# Altium PCB 解调.PcbDoc
Units mil, origin at the board's own origin, x right, y up, seen from the top; angles counter-clockwise.
Board outline 6000 x 4000 mil, 2 copper layers (Top Layer, Bottom Layer); 66 components, 17 nets, 180 pads, 0 vias.
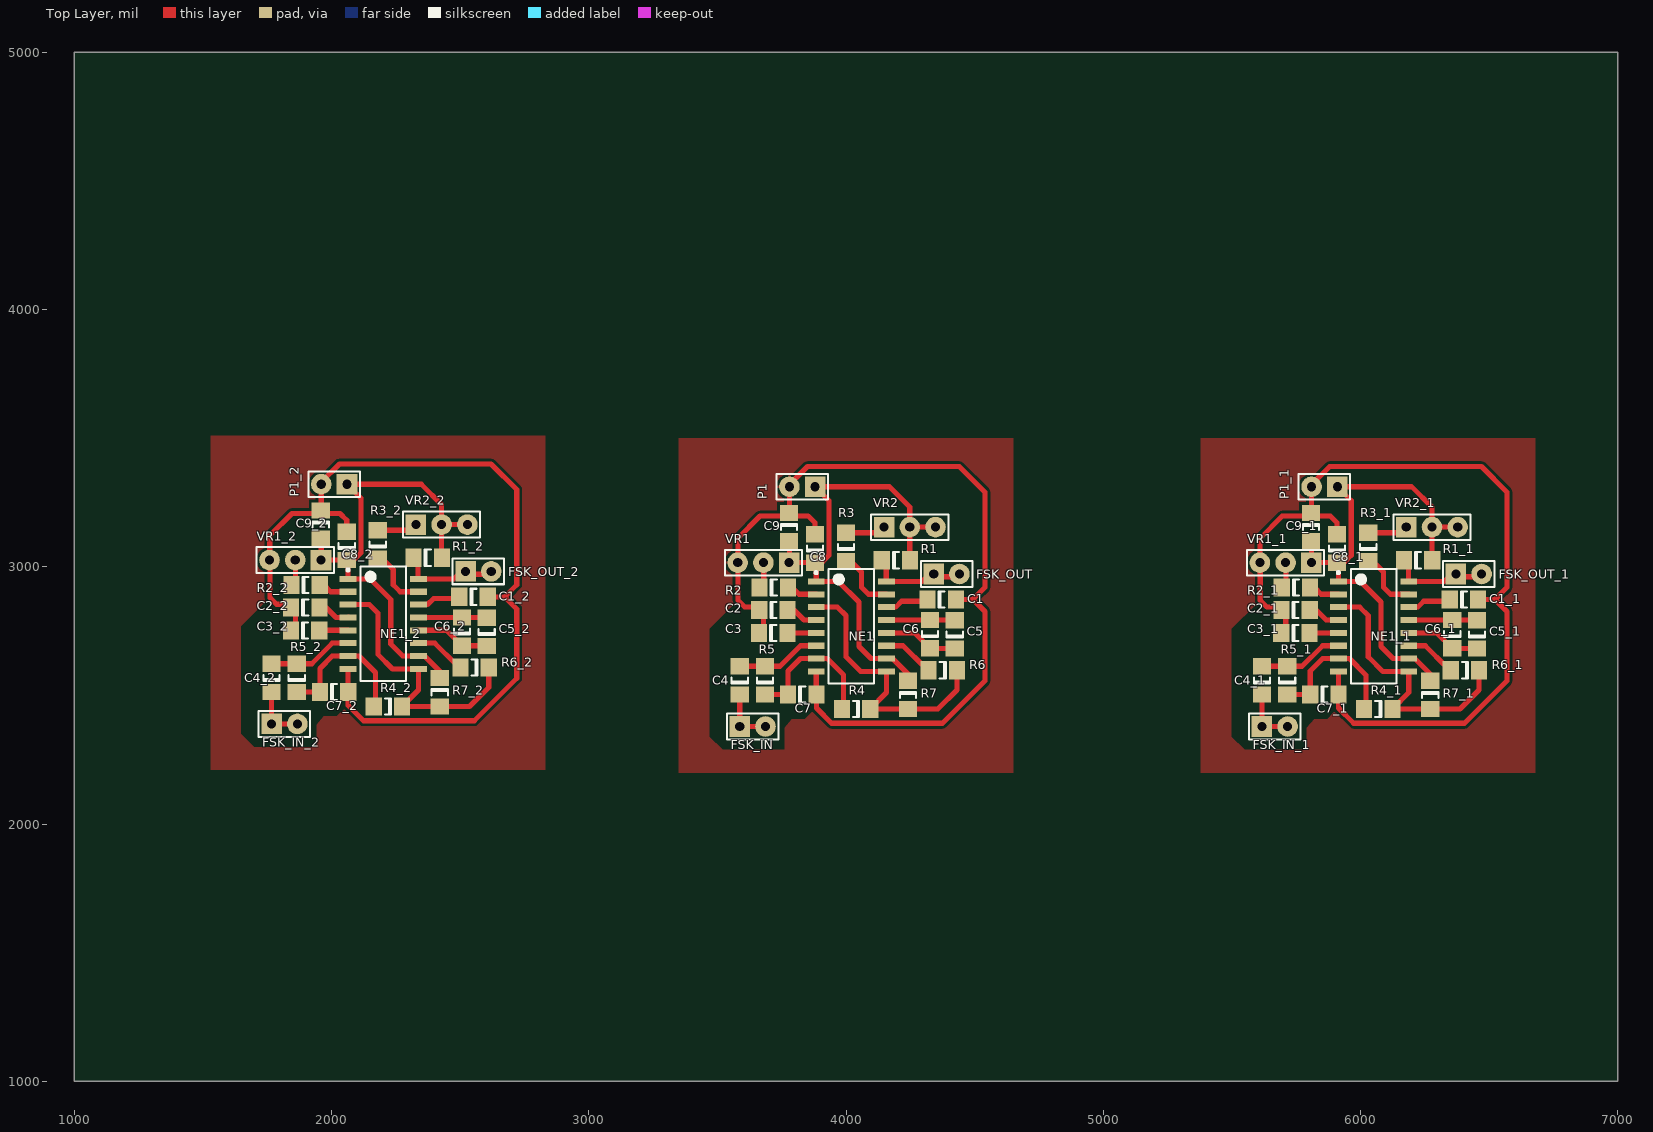
[diagram p0: Top Layer view]
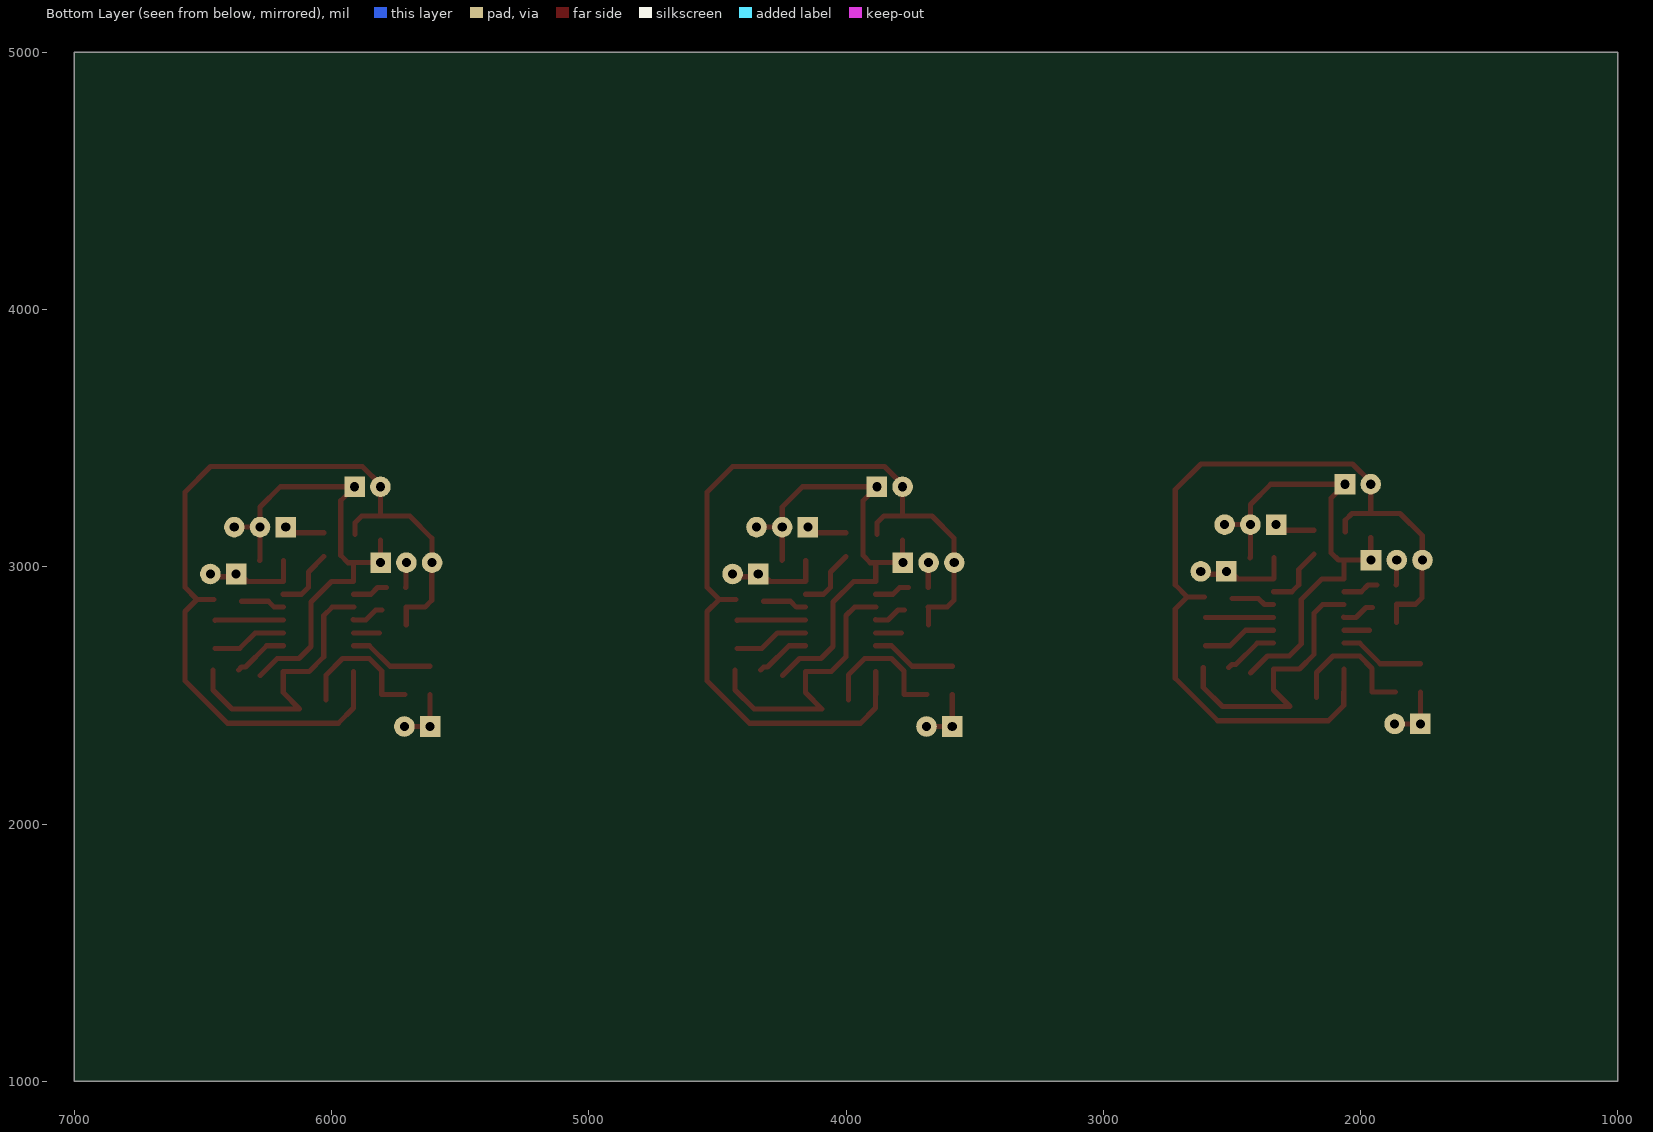
[diagram p1: Bottom Layer view, seen from below]

## Layer stack, top to bottom
Top Layer: signal copper 1.4
Dielectric: dielectric 12.6, FR-4, Dk 4.8
Bottom Layer: signal copper 1.4

## Board outline
1000,1000 7000,1000 7000,5000 1000,5000

## Design rules (kind name [scope] priority, off if disabled: settings)
Clearance [All] p1: gap=10
ComponentClearance [All] p1 off: gap=10 collisioncheckmode=3 verticalgap=10 showdistances=FALSE
MinimumSolderMaskSliver [All] p1 off: minsoldermaskwidth=10
PolygonConnect [All] p1: connectstyle=Relief reliefconductorwidth=10 reliefentries=4 polygonreliefangle="90 Angle"
RoutingVias [All] p1: holewidth=28 width=50 viastyle="Through Hole" minholewidth=28 minwidth=50 maxholewidth=28 maxwidth=50
SilkToSilkClearance [All] p1 off: silktosilkclearance=10
SilkscreenOverComponentPads [All] p1 off: minsilkscreentomaskgap=10
SolderMaskExpansion [All] p1: expansion=4
TestPointUsage [All] p1: valid=0 allowmultiple=FALSE
Testpoint [All] p1: side=15 testpointundercomponent=TRUE minsize=40 maxsize=100 preferedsize=60 minholesize=0 maxholesize=40 preferedholesize=32 testpointgrid=1 style=1023 order=0123456789
Width [All] p1: maxlimit=60 minlimit=20 preferedwidth=40
20 further rules are at their usual default settings.

## Classes and differential pairs
component class NE564解调: C1 C2 C3 C4 C5 C6 C7 C8 C9 C? FSK_IN FSK_OUT JP1 NE1 P1 P2 P? R1 R2 R3 R4 R5 R6 R7 R8 R? VR1 VR2 VR?

## Components (designator, comment, footprint, x,y, rotation, side; value= is the part's Value field where it differs from the comment)
C1 "Cap Pol1" C1206 4372,2873 r0 top
C1_1 "Cap Pol1" C1206 6402,2873 r0 top (schematic designator C1)
C1_2 "Cap Pol1" C1206 2552,2883 r0 top (schematic designator C1)
C2 "Cap" C1206 3718,2832 r0 top
C2_1 "Cap" C1206 5748,2832 r0 top (schematic designator C2)
C2_2 "Cap" C1206 1898,2842 r0 top (schematic designator C2)
C3 "Cap" C1206 3717,2742 r0 top
C3_1 "Cap" C1206 5747,2742 r0 top (schematic designator C3)
C3_2 "Cap" C1206 1897,2752 r0 top (schematic designator C3)
C4 "Cap" C1206 3587,2558 r90 top
C4_1 "Cap" C1206 5617,2558 r90 top (schematic designator C4)
C4_2 "Cap" C1206 1767,2568 r90 top (schematic designator C4)
C5 "Cap" C1206 4423,2737 r90 top
C5_1 "Cap" C1206 6453,2737 r90 top (schematic designator C5)
C5_2 "Cap" C1206 2603,2747 r90 top (schematic designator C5)
C6 "Cap" C1206 4327,2738 r90 top
C6_1 "Cap" C1206 6357,2738 r90 top (schematic designator C6)
C6_2 "Cap" C1206 2507,2748 r90 top (schematic designator C6)
C7 "Cap" C1206 3830,2503 r0 top
C7_1 "Cap" C1206 5860,2503 r0 top (schematic designator C7)
C7_2 "Cap" C1206 2010,2513 r0 top (schematic designator C7)
C8 "Cap Pol1" C1206 3879,3071 r90 top
C8_1 "Cap Pol1" C1206 5909,3071 r90 top (schematic designator C8)
C8_2 "Cap Pol1" C1206 2059,3081 r90 top (schematic designator C8)
C9 "Cap" C1206 3778,3154 r270 top
C9_1 "Cap" C1206 5808,3154 r270 top (schematic designator C9)
C9_2 "Cap" C1206 1958,3164 r270 top (schematic designator C9)
FSK_IN "Header 2" HDR1X2 3587,2379 r0 top
FSK_IN_1 "Header 2" HDR1X2 5617,2379 r0 top (schematic designator FSK_IN)
FSK_IN_2 "Header 2" HDR1X2 1767,2389 r0 top (schematic designator FSK_IN)
FSK_OUT "Header 2" HDR1X2 4341,2972 r0 top
FSK_OUT_1 "Header 2" HDR1X2 6371,2972 r0 top (schematic designator FSK_OUT)
FSK_OUT_2 "Header 2" HDR1X2 2521,2982 r0 top (schematic designator FSK_OUT)
NE1 "NE564" SO-16 4021,2768 r270 top
NE1_1 "NE564" SO-16 6051,2768 r270 top (schematic designator NE1)
NE1_2 "NE564" SO-16 2201,2778 r270 top (schematic designator NE1)
P1 "Header 2" HDR1X2 3880,3311 r180 top
P1_1 "Header 2" HDR1X2 5910,3311 r180 top (schematic designator P1)
P1_2 "Header 2" HDR1X2 2060,3321 r180 top (schematic designator P1)
R1 "Res2" C1206 4194,3025 r0 top
R1_1 "Res2" C1206 6224,3025 r0 top (schematic designator R1)
R1_2 "Res2" C1206 2374,3035 r0 top (schematic designator R1)
R2 "Res2" C1206 3719,2919 r0 top
R2_1 "Res2" C1206 5749,2919 r0 top (schematic designator R2)
R2_2 "Res2" C1206 1899,2929 r0 top (schematic designator R2)
R3 "Res2" C1206 4000,3077 r90 top
R3_1 "Res2" C1206 6030,3077 r90 top (schematic designator R3)
R3_2 "Res2" C1206 2180,3087 r90 top (schematic designator R3)
R4 "Res2" C1206 4039,2447 r180 top
R4_1 "Res2" C1206 6069,2447 r180 top (schematic designator R4)
R4_2 "Res2" C1206 2219,2457 r180 top (schematic designator R4)
R5 "Res2" C1206 3685,2558 r90 top
R5_1 "Res2" C1206 5715,2558 r90 top (schematic designator R5)
R5_2 "Res2" C1206 1865,2568 r90 top (schematic designator R5)
R6 "Res2" C1206 4376,2598 r180 top
R6_1 "Res2" C1206 6406,2598 r180 top (schematic designator R6)
R6_2 "Res2" C1206 2556,2608 r180 top (schematic designator R6)
R7 "Res2" C1206 4241,2502 r270 top
R7_1 "Res2" C1206 6271,2502 r270 top (schematic designator R7)
R7_2 "Res2" C1206 2421,2512 r270 top (schematic designator R7)
VR1 "variable resister" HDR1X3 3779,3016 r180 top
VR1_1 "variable resister" HDR1X3 5809,3016 r180 top (schematic designator VR1)
VR1_2 "variable resister" HDR1X3 1959,3026 r180 top (schematic designator VR1)
VR2 "variable resister" HDR1X3 4148,3154 r0 top
VR2_1 "variable resister" HDR1X3 6178,3154 r0 top (schematic designator VR2)
VR2_2 "variable resister" HDR1X3 2328,3164 r0 top (schematic designator VR2)

## Footprints (in the part's own frame and the unit in brackets; to place one, negate y for a bottom-side part, rotate by r counter-clockwise, add the part's x,y. Pads: shape width x height; smd on the part's side, far side on the other; paste and mask are expansions set on the pad)
C1206 [mm] "Chip Capacitor; Body 3.2 x 1.6 mm (LxW typ)"
  rect 1.6x1.8 smd: 1(-1.4,0) 2(1.4,0)
  silkscreen extent -0.3,-0.8 0.3,0.8
HDR1X2 [mil] "Connector; Header; 2 Position"
  rect 80x80 hole 35.43: 1(0,0)
  round 80 hole 35.43: 2(100,0)
  silkscreen extent -50,-50 150,50
HDR1X3 [mil] "Connector; Header; 3 Position"
  rect 80x80 hole 35.43: 1(0,0)
  round 80 hole 35.43: 2(100,0) 3(200,0)
  silkscreen extent -50,-50 250,50
SO-16 [mm] "Small Outline; 16 Leads; Body Width 5.6 mm; Pitch 1.27 mm"
  rect 0.6x1.65 smd: 1(-4.445,-3.475) 2(-3.175,-3.475) 3(-1.905,-3.475) 4(-0.635,-3.475) 5(0.635,-3.475) 6(1.905,-3.475) 7(3.175,-3.475) 8(4.445,-3.475) 9(4.445,3.475) 10(3.175,3.475) 11(1.905,3.475) 12(0.635,3.475) 13(-0.635,3.475) 14(-1.905,3.475) 15(-3.175,3.475) 16(-4.445,3.475)
  silkscreen extent -5.65,-3.6 5.65,2.25

## Part data
C1 C1_1 C1_2 C8 C8_1 C8_2: "Polarized Capacitor (Radial)"
C2 C2_1 C2_2 C3 C3_1 C3_2 C4 C4_1 C4_2 C5 C5_1 C5_2 C6 C6_1 C6_2 C7 C7_1 C7_2 C9 C9_1 C9_2: "Capacitor"
FSK_IN FSK_IN_1 FSK_IN_2 FSK_OUT FSK_OUT_1 FSK_OUT_2 P1 P1_1 P1_2: "Header, 2-Pin"
R1 R1_1 R1_2 R2 R2_1 R2_2 R3 R3_1 R3_2 R4 R4_1 R4_2 R5 R5_1 R5_2 R6 R6_1 R6_2 R7 R7_1 R7_2: "Resistor"
VR1 VR1_1 VR1_2 VR2 VR2_1 VR2_2: library part vr

## Nets (pads, with @x,y where several pads share a name; then routed paths per layer and width w, separated by ;. In a path a pad name is that pad's centre, name@x,y a point inside that pad or via, vN(x,y) a via of type N, cw(c..) or ccw(c..) an arc to the next point about the centre after c; other vN are vias at no path point)
+5: C8.1 C9.2 NE1.1 NE1.10 P1.1 R1.2 R7.1 VR1.1 VR2.2 VR2.3 | length 1930.9
  Top Layer w20: VR1.1 3878.88,3016 C8.1 3905.88,3015.88 3934.43,3044.43 3934.43,3256.57 P1.1 4169,3311 4248,3232 VR2.2 ; VR1.1@3780,3026 C9.2@3780,3103.6 ; C8.1@3884.19,3015.88 NE1.1 3970,2943 4050,2863 4050,2690 4097,2643 NE1.10 4181.12,2643 R7.1@4247.06,2577.06 ; R1.2 4248,3026.12 VR2.2 ; VR2.3 VR2.2
FSKIN: C4.1 FSK_IN.1 FSK_IN.2 | length 223.9
  Top Layer w20: C4.1 FSK_IN.1 FSK_IN.2
FSKOUT: FSK_OUT.1 FSK_OUT.2 NE1.16 R1.1 | length 346.1
  Top Layer w20: R1.1@4156.6,3025 4156.6,2944.21 NE1.16 4296,2943 4314,2961 FSK_OUT.2@4414,2961
GND: C1.2 C2.1 C3.1 C7.2 C8.2 C9.1 NE1.8 P1.2 VR1.3 | length 3512.6
  Top Layer w20: VR1.3@3580,3032.43 VR1.3@3580,3016 ; C3.1@3679.6,2773 3679.6,2843 3680.6,2844 3606,2844 3580.53,2869.47 3580.53,3014.94 3580,3015.47 VR1.3@3580,3016 ; C8.2 3879,3171 3852.88,3197.12 C9.1@3779,3197.12 ; NE1.8 3884.19,2503.93 C7.2 3885.12,2450.55 3944.1,2391.57 4374.9,2391.57 4540,2556.67 4540,2826 4493,2873 ; C1.2 4493,2873 ; VR1.3@3580,3016 3580,3111 3666.12,3197.12 C9.1@3779,3197.12 ; C9.1@3779,3197.12 3780,3198.12 P1.2 3780,3319.28 3850.72,3390 4440,3390 4540,3290 4540,2920 4493,2873
NetC1_1: C1.1 NE1.14 | length 171.7
  Top Layer w20: NE1.14 4193,2843 4216,2866 C1.1@4320,2866
NetC2_2: C2.2 NE1.4 | length 129.4
  Top Layer w20: C2.2 3798,2832 3837,2793 NE1.4 NE1.4@3885.72,2794.53
NetC3_2: C3.2 NE1.5 | length 99.8
  Top Layer w20: C3.2@3784.4,2743 NE1.5
NetC4_2: C4.2 NE1.6 R5.2 | length 330.3
  Top Layer w20: C4.2 R5.2 3743.12,2613.12 3823,2693 NE1.6
NetC5_1: C5.1 C6.1 NE1.12 | length 290.5
  Top Layer w20: NE1.12 4266.88,2743 C6.1 4422,2682.88 C5.1
NetC5_2: C5.2 C6.2 NE1.13 | length 265.6
  Top Layer w20: NE1.13 C6.2@4327,2793 ; C6.2 4422,2793.12 C5.2
NetC7_1: C7.1 NE1.7 R4.2 R5.1 | length 540.3
  Top Layer w20: R5.1 3685.12,2503 C7.1 3774.88,2594.88 3823,2643 NE1.7 3927,2643 3990.88,2579.12 3990.88,2483
NetNE1_2: NE1.2 R2.2 | length 138.6
  Top Layer w20: R2.2@3756.4,2919 3791,2919 3817,2893 NE1.2
NetNE1_3: NE1.3 NE1.9 R4.1 R6.1 R7.2 | length 1102.7
  Top Layer w20: NE1.3@3883.66,2843.53 NE1.3 ; NE1.3@3898.2,2843 NE1.3 ; R6.1 4431.12,2521.12 4356.88,2446.88 R7.2 4240.88,2447 R4.1 4157.81,2510.69 NE1.9 4057,2593 4000,2650 4000,2810 3967,2843 NE1.3
NetNE1_11: NE1.11 R6.2 | length 213.4
  Top Layer w20: NE1.11 4221.67,2693 4304.67,2610 4319.88,2610 R6.2@4331.88,2598
NetNE1_15: NE1.15 R3.1 | length 253.4
  Top Layer w20: R3.1@4000,3039.6 4060,2979.6 4060,2920 4087,2893 NE1.15
NetR2_1: R2.1 VR1.2 | length 97.7
  Top Layer w20: VR1.2@3680,3016 3680,2920.6 R2.1@3681.6,2919
NetR3_2: R3.2 VR2.1 | length 157.1
  Top Layer w20: R3.2 4126.12,3132.12 VR2.1
pads on no net: C1_1.1 C1_1.2 C1_2.1 C1_2.2 C2_1.1 C2_1.2 C2_2.1 C2_2.2 C3_1.1 C3_1.2 C3_2.1 C3_2.2 C4_1.1 C4_1.2 C4_2.1 C4_2.2 C5_1.1 C5_1.2 C5_2.1 C5_2.2 C6_1.1 C6_1.2 C6_2.1 C6_2.2 C7_1.1 C7_1.2 C7_2.1 C7_2.2 C8_1.1 C8_1.2 C8_2.1 C8_2.2 C9_1.1 C9_1.2 C9_2.1 C9_2.2 FSK_IN_1.1 FSK_IN_1.2 FSK_IN_2.1 FSK_IN_2.2 FSK_OUT_1.1 FSK_OUT_1.2 FSK_OUT_2.1 FSK_OUT_2.2 NE1_1.1 NE1_1.2 NE1_1.3 NE1_1.4 NE1_1.5 NE1_1.6 NE1_1.7 NE1_1.8 NE1_1.9 NE1_1.10 NE1_1.11 NE1_1.12 NE1_1.13 NE1_1.14 NE1_1.15 NE1_1.16 NE1_2.1 NE1_2.2 NE1_2.3 NE1_2.4 NE1_2.5 NE1_2.6 NE1_2.7 NE1_2.8 NE1_2.9 NE1_2.10 NE1_2.11 NE1_2.12 NE1_2.13 NE1_2.14 NE1_2.15 NE1_2.16 P1_1.1 P1_1.2 P1_2.1 P1_2.2 R1_1.1 R1_1.2 R1_2.1 R1_2.2 R2_1.1 R2_1.2 R2_2.1 R2_2.2 R3_1.1 R3_1.2 R3_2.1 R3_2.2 R4_1.1 R4_1.2 R4_2.1 R4_2.2 R5_1.1 R5_1.2 R5_2.1 R5_2.2 R6_1.1 R6_1.2 R6_2.1 R6_2.2 R7_1.1 R7_1.2 R7_2.1 R7_2.2 VR1_1.1 VR1_1.2 VR1_1.3 VR1_2.1 VR1_2.2 VR1_2.3 VR2_1.1 VR2_1.2 VR2_1.3 VR2_2.1 VR2_2.2 VR2_2.3
copper on no net: | length 19607.9
  Top Layer w20: 1760,3042.43 1760,3026 ; 1767,2512.88 1767,2389 1867,2389 ; 1767,2623.12 1865,2623.12 1923.12,2623.12 2003,2703 2064.19,2703 ; 1859.6,2783 1859.6,2853 1860.6,2854 1786,2854 1760.53,2879.47 1760.53,3024.94 1760,3025.47 1760,3026 ; 1860,3026 1860,2930.6 1861.6,2929 ; 1865,2512.88 1865.12,2513 1954.88,2513 1954.88,2604.88 2003,2653 2064.19,2653 2107,2653 2170.88,2589.12 2170.88,2493 ; 1936.4,2929 1971,2929 1997,2903 2064.19,2903 ; 1953.12,2842 1978,2842 2017,2803 2064.19,2803 2065.72,2804.53 ; 1959,3026 2058.88,3026 2059,3025.88 2085.88,3025.88 2114.43,3054.43 2114.43,3266.57 2060,3321 2349,3321 2428,3242 2428,3164 ; 1960,3036 1960,3113.6 ; 1964.4,2753 2064.19,2753 ; 2059,3136.12 2059,3181 2032.88,3207.12 1959,3207.12 ; 2063.66,2853.53 2064.19,2853 ; 2064.19,2603 2064.19,2513.93 2065.12,2513 2065.12,2460.55 2124.1,2401.57 2554.9,2401.57 2720,2566.67 2720,2836 2673,2883 ; 2064.19,3025.88 2064.19,2953 2150,2953 2230,2873 2230,2700 2277,2653 2337.81,2653 2361.12,2653 2427.06,2587.06 ; 2078.2,2853 2064.19,2853 ; 2180,3049.6 2240,2989.6 2240,2930 2267,2903 2337.81,2903 ; 2180,3142.12 2306.12,3142.12 2328,3164 ; 2336.6,3035 2336.6,2954.21 2337.81,2953 2476,2953 2494,2971 2594,2971 ; 2337.81,2703 2401.67,2703 2484.67,2620 2499.88,2620 2511.88,2608 ; 2337.81,2753 2446.88,2753 2507,2692.88 2602,2692.88 2603,2691.88 ; 2337.81,2803 2507,2803 ; 2337.81,2853 2373,2853 2396,2876 2500,2876 ; 2429.12,3035 2428,3036.12 2428,3164 ; 2507,2803.12 2602,2803.12 2603,2802.12 ; 2528,3164 2428,3164 ; 2607.12,2883 2673,2883 ; 2611.12,2608 2611.12,2531.12 2536.88,2456.88 2421,2456.88 2420.88,2457 2274.12,2457 2337.81,2520.69 2337.81,2603 2237,2603 2180,2660 2180,2820 2147,2853 2064.19,2853 ; 5610,3032.43 5610,3016 ; 5617,2502.88 5617,2379 5717,2379 ; 5617,2613.12 5715,2613.12 5773.12,2613.12 5853,2693 5914.19,2693 ; 5709.6,2773 5709.6,2843 5710.6,2844 5636,2844 5610.53,2869.47 5610.53,3014.94 5610,3015.47 5610,3016 ; 5710,3016 5710,2920.6 5711.6,2919 ; 5715,2502.88 5715.12,2503 5804.88,2503 5804.88,2594.88 5853,2643 5914.19,2643 5957,2643 6020.88,2579.12 6020.88,2483 ; 5786.4,2919 5821,2919 5847,2893 5914.19,2893 ; 5803.12,2832 5828,2832 5867,2793 5914.19,2793 5915.72,2794.53 ; 5809,3016 5908.88,3016 5909,3015.88 5935.88,3015.88 5964.43,3044.43 5964.43,3256.57 5910,3311 6199,3311 6278,3232 6278,3154 ; 5810,3026 5810,3103.6 ; 5814.4,2743 5914.19,2743 ; 5909,3126.12 5909,3171 5882.88,3197.12 5809,3197.12 ; 5913.66,2843.53 5914.19,2843 ; 5914.19,2593 5914.19,2503.93 5915.12,2503 5915.12,2450.55 5974.1,2391.57 6404.9,2391.57 6570,2556.67 6570,2826 6523,2873 ; 5914.19,3015.88 5914.19,2943 6000,2943 6080,2863 6080,2690 6127,2643 6187.81,2643 6211.12,2643 6277.06,2577.06 ; 5928.2,2843 5914.19,2843 ; 6030,3039.6 6090,2979.6 6090,2920 6117,2893 6187.81,2893 ; 6030,3132.12 6156.12,3132.12 6178,3154 ; 6186.6,3025 6186.6,2944.21 6187.81,2943 6326,2943 6344,2961 6444,2961 ; 6187.81,2693 6251.67,2693 6334.67,2610 6349.88,2610 6361.88,2598 ; 6187.81,2743 6296.88,2743 6357,2682.88 6452,2682.88 6453,2681.88 ; 6187.81,2793 6357,2793 ; 6187.81,2843 6223,2843 6246,2866 6350,2866 ; 6279.12,3025 6278,3026.12 6278,3154 ; 6357,2793.12 6452,2793.12 6453,2792.12 ; 6378,3154 6278,3154 ; 6457.12,2873 6523,2873 ; 6461.12,2598 6461.12,2521.12 6386.88,2446.88 6271,2446.88 6270.88,2447 6124.12,2447 6187.81,2510.69 6187.81,2593 6087,2593 6030,2650 6030,2810 5997,2843 5914.19,2843 ; 1760,3026 1760,3121 1846.12,3207.12 1959,3207.12 ; 1959,3207.12 1960,3208.12 1960,3321 1960,3329.28 2030.72,3400 2620,3400 2720,3300 2720,2930 2673,2883 ; 5610,3016 5610,3111 5696.12,3197.12 5809,3197.12 ; 5809,3197.12 5810,3198.12 5810,3311 5810,3319.28 5880.72,3390 6470,3390 6570,3290 6570,2920 6523,2873

## Polygon pours and split planes (outlines as drawn)
no net on Top Layer "Top Layer-No Net" (solid, pour order 1000): 1530,2210 1530,3510 2830,3510 2830,2210 1530,2210
no net on Top Layer "Top Layer-No Net" (solid, pour order 1000): 5380,2200 5380,3500 6680,3500 6680,2200 5380,2200
GND on Top Layer "Top Layer-No Net" (solid, pour order 1000): 3350,2200 3350,3500 4650,3500 4650,2200 3350,2200

## Other copper
Top Layer:
  pour cut-out: 2620,3400 2720,3300 2720,2930 2679.18,2889.18 2720,2848.35 2720,2566.67 2566,2412.67 2135.2,2412.67 2124.1,2401.57 2065.12,2460.55 2060.55,2460.55 2020,2420 1970,2420 1940,2385 1940,2300 1700,2300 1650,2350 1650,2768.94 1760.53,2879.47 1760,2880 1760,3121 1773.88,3121 1860,3207.12 1959,3207.12 1959,3320 2030.72,3391.72 2030.72,3400
  pour cut-out: 6470,3390 6570,3290 6570,2920 6529.18,2879.18 6570,2838.35 6570,2556.67 6416,2402.67 5985.2,2402.67 5974.1,2391.57 5915.12,2450.55 5910.55,2450.55 5870,2410 5820,2410 5790,2375 5790,2290 5550,2290 5500,2340 5500,2758.94 5610.53,2869.47 5610,2870 5610,3111 5623.88,3111 5710,3197.12 5809,3197.12 5809,3310 5880.72,3381.72 5880.72,3390
  pour cut-out: 4440,3390 4540,3290 4540,2920 4499.18,2879.18 4540,2838.35 4540,2556.67 4386,2402.67 3955.2,2402.67 3944.1,2391.57 3885.12,2450.55 3880.55,2450.55 3840,2410 3790,2410 3760,2375 3760,2290 3520,2290 3470,2340 3470,2758.94 3580.53,2869.47 3580,2870 3580,3111 3593.88,3111 3680,3197.12 3779,3197.12 3779,3310 3850.72,3381.72 3850.72,3390